# Altium PCB Quectel_EC600M-CN_PCB_Footprint_AD_V1.2.PcbDoc
Units mm, origin at the board's own origin, x right, y up, seen from the top; angles counter-clockwise.
Board outline 152.4 x 101.6 mm, 2 copper layers (Top Layer, Bottom Layer); 1 components, 0 nets, 100 pads, 0 vias.
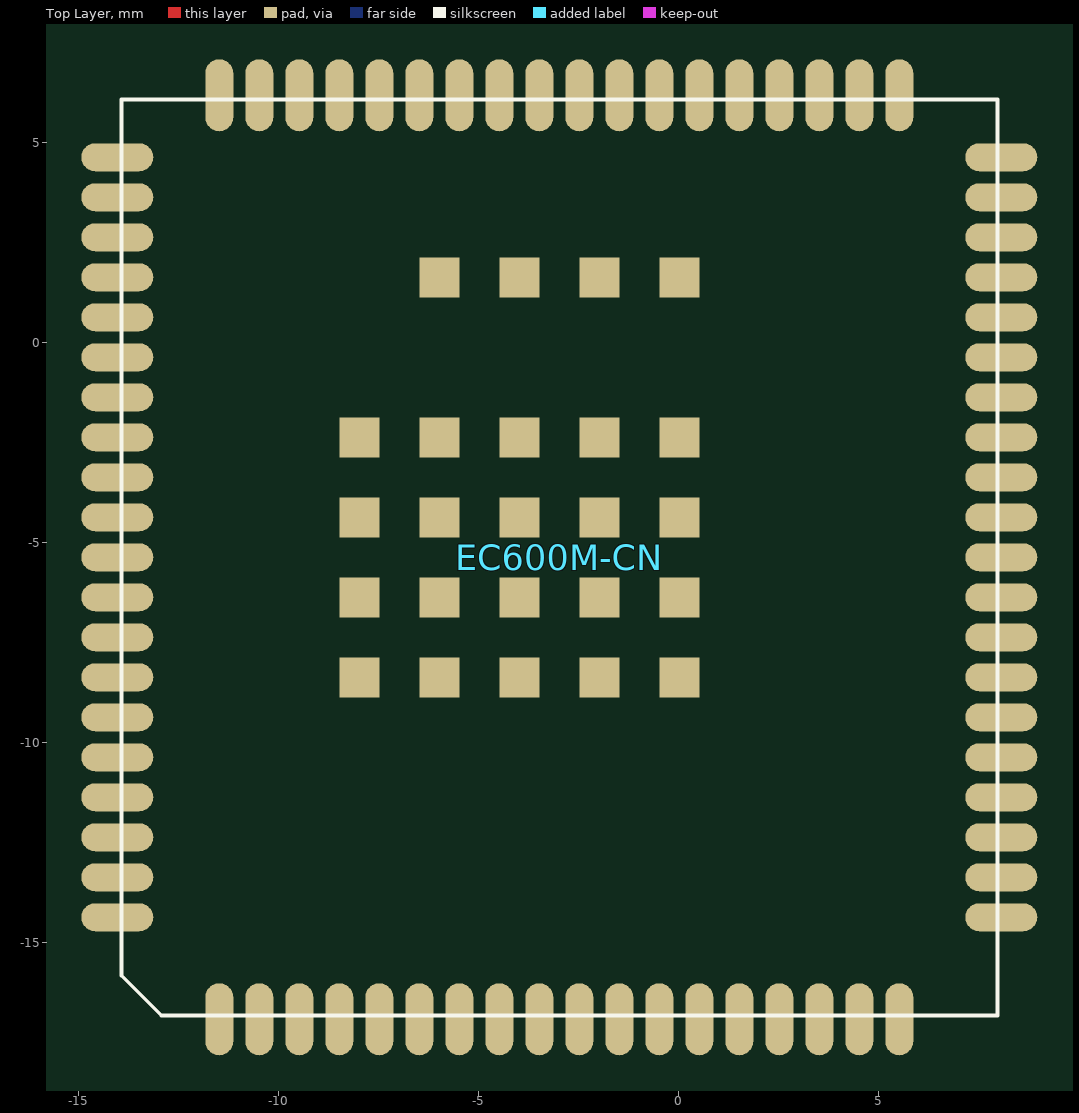
[diagram p0: Top Layer view]
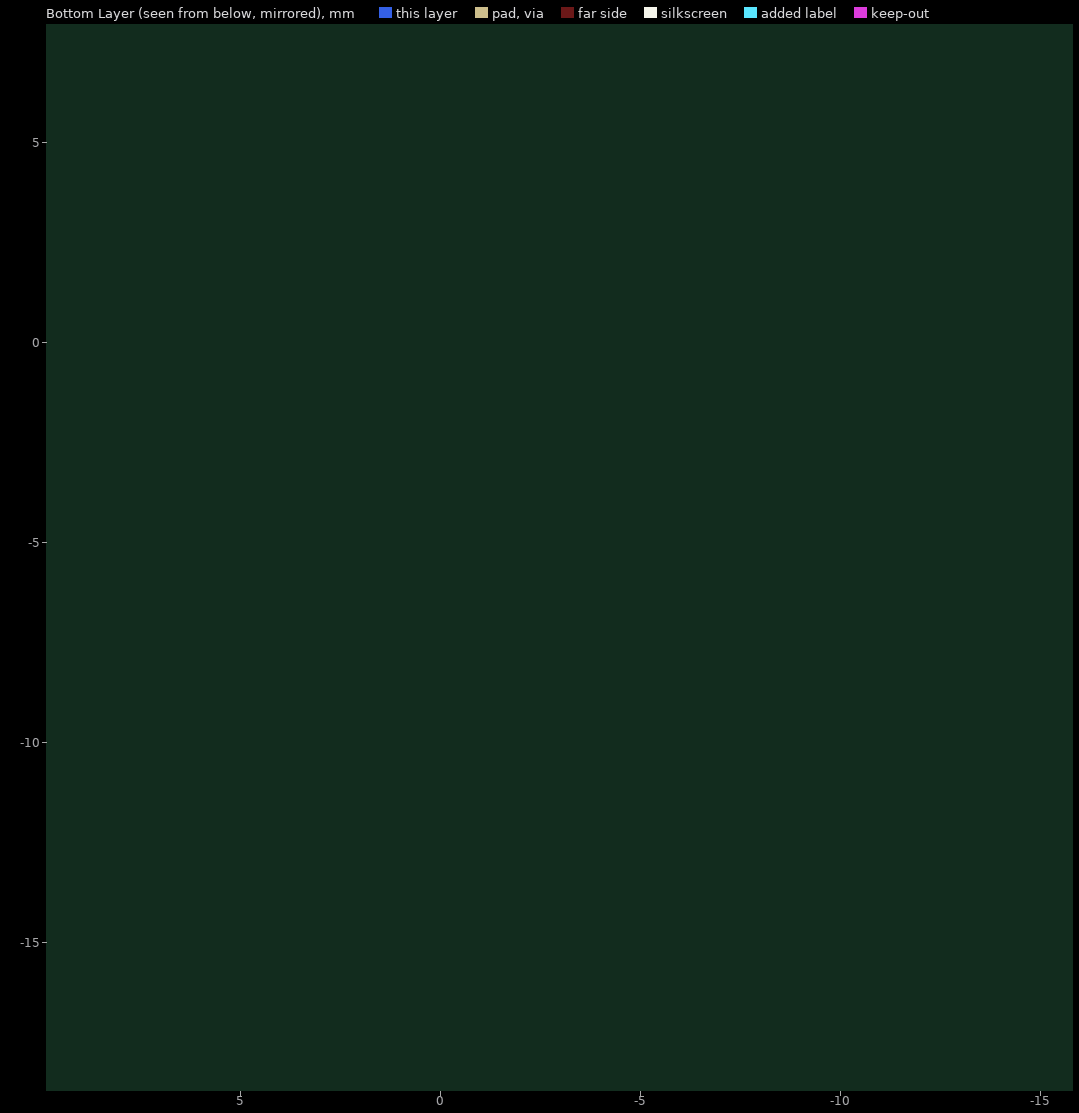
[diagram p1: Bottom Layer view, seen from below]

## Layer stack, top to bottom
Top Solder: solder mask 0.0102, Solder Resist, Dk 3.5
Top Layer: signal copper 0.0356
Dielectric1: dielectric 0.32, FR-4, Dk 4.8
Bottom Layer: signal copper 0.0356
Bottom Solder: solder mask 0.0102, Solder Resist, Dk 3.5

## Board outline
-70.739,-53.721 81.661,-53.721 81.661,47.879 -70.739,47.879

## Design rules (kind name [scope] priority, off if disabled: settings)
Clearance [All] p1: gap=0.254 ignorepadtopadclearanceinfootprint=FALSE except(0: Arc-Hole Track-Hole SMDPad-Hole THPad-Hole Via-Hole Fill-Hole Poly-Hole Region-Hole Text-Hole)
PolygonConnect [All] p1: connectstyle=Relief reliefconductorwidth=0.254 reliefentries=4 polygonreliefangle="90 Angle" airgapwidth=0.254
RoutingVias [All] p1: holewidth=0.711 width=1.27 viastyle="Through Hole" minholewidth=0.711 minwidth=1.27 maxholewidth=0.711 maxwidth=1.27
SolderMaskExpansion [All] p1: expansion=0.102 istentingtop=FALSE
Width [All] p1: maxlimit=0.254 minlimit=0.254 preferedwidth=0.254
30 further rules are at their usual default settings.

## Components (designator, comment, footprint, x,y, rotation, side; value= is the part's Value field where it differs from the comment)
EC600M-CN "Comment" EC600M-CN -2.975,-5.375 r0 top

## Footprints (in the part's own frame and the unit in brackets; to place one, negate y for a bottom-side part, rotate by r counter-clockwise, add the part's x,y. Pads: shape width x height; smd on the part's side, far side on the other; paste and mask are expansions set on the pad)
EC600M-CN [mm] "EC600M-CN Module 76LCC 24LGA 21.9×22.9mm H2.4mm RO"
  oval 0.7x1.8 smd mask+0.05: 1(-8.5,-11.55) 2(-7.5,-11.55) 3(-6.5,-11.55) 4(-5.5,-11.55) 5(-4.5,-11.55) 6(-3.5,-11.55) 7(-2.5,-11.55) 8(-1.5,-11.55) 9(-0.5,-11.55) 10(0.5,-11.55) 11(1.5,-11.55) 12(2.5,-11.55) 13(3.5,-11.55) 14(4.5,-11.55) 15(5.5,-11.55) 16(6.5,-11.55) 17(7.5,-11.55) 18(8.5,-11.55) 39(8.5,11.55) 40(7.5,11.55) 41(6.5,11.55) 42(5.5,11.55) 43(4.5,11.55) 44(3.5,11.55) 45(2.5,11.55) 46(1.5,11.55) 47(0.5,11.55) 48(-0.5,11.55) 49(-1.5,11.55) 50(-2.5,11.55) 51(-3.5,11.55) 52(-4.5,11.55) 53(-5.5,11.55) 54(-6.5,11.55) 55(-7.5,11.55) 56(-8.5,11.55)
  oval 1.8x0.7 smd mask+0.05: 19(11.05,-9) 20(11.05,-8) 21(11.05,-7) 22(11.05,-6) 23(11.05,-5) 24(11.05,-4) 25(11.05,-3) 26(11.05,-2) 27(11.05,-1) 28(11.05,0) 29(11.05,1) 30(11.05,2) 31(11.05,3) 32(11.05,4) 33(11.05,5) 34(11.05,6) 35(11.05,7) 36(11.05,8) 37(11.05,9) 38(11.05,10) 57(-11.05,10) 58(-11.05,9) 59(-11.05,8) 60(-11.05,7) 61(-11.05,6) 62(-11.05,5) 63(-11.05,4) 64(-11.05,3) 65(-11.05,2) 66(-11.05,1) 67(-11.05,0) 68(-11.05,-1) 69(-11.05,-2) 70(-11.05,-3) 71(-11.05,-4) 72(-11.05,-5) 73(-11.05,-6) 74(-11.05,-7) 75(-11.05,-8) 76(-11.05,-9)
  rect 1x1 smd mask+0.05: 77(-3,-3) 78(-1,-3) 79(1,-3) 80(3,-3) 81(3,-1) 82(3,1) 83(3,3) 84(1,3) 85(-1,3) 86(-3,3) 87(-3,1) 88(-3,-1) 89(-1,-1) 90(1,-1) 91(1,1) 92(-1,1) 109(-5,3) 110(-5,1) 111(-5,-1) 112(-5,-3) 145(3,7) 146(1,7) 147(-1,7) 148(-3,7)
  silkscreen extent -10.95,-11.45 10.95,11.45

## Nets (pads, with @x,y where several pads share a name; then routed paths per layer and width w, separated by ;. In a path a pad name is that pad's centre, name@x,y a point inside that pad or via, vN(x,y) a via of type N, cw(c..) or ccw(c..) an arc to the next point about the centre after c; other vN are vias at no path point)
pads on no net: EC600M-CN.1 EC600M-CN.2 EC600M-CN.3 EC600M-CN.4 EC600M-CN.5 EC600M-CN.6 EC600M-CN.7 EC600M-CN.8 EC600M-CN.9 EC600M-CN.10 EC600M-CN.11 EC600M-CN.12 EC600M-CN.13 EC600M-CN.14 EC600M-CN.15 EC600M-CN.16 EC600M-CN.17 EC600M-CN.18 EC600M-CN.19 EC600M-CN.20 EC600M-CN.21 EC600M-CN.22 EC600M-CN.23 EC600M-CN.24 EC600M-CN.25 EC600M-CN.26 EC600M-CN.27 EC600M-CN.28 EC600M-CN.29 EC600M-CN.30 EC600M-CN.31 EC600M-CN.32 EC600M-CN.33 EC600M-CN.34 EC600M-CN.35 EC600M-CN.36 EC600M-CN.37 EC600M-CN.38 EC600M-CN.39 EC600M-CN.40 EC600M-CN.41 EC600M-CN.42 EC600M-CN.43 EC600M-CN.44 EC600M-CN.45 EC600M-CN.46 EC600M-CN.47 EC600M-CN.48 EC600M-CN.49 EC600M-CN.50 EC600M-CN.51 EC600M-CN.52 EC600M-CN.53 EC600M-CN.54 EC600M-CN.55 EC600M-CN.56 EC600M-CN.57 EC600M-CN.58 EC600M-CN.59 EC600M-CN.60 EC600M-CN.61 EC600M-CN.62 EC600M-CN.63 EC600M-CN.64 EC600M-CN.65 EC600M-CN.66 EC600M-CN.67 EC600M-CN.68 EC600M-CN.69 EC600M-CN.70 EC600M-CN.71 EC600M-CN.72 EC600M-CN.73 EC600M-CN.74 EC600M-CN.75 EC600M-CN.76 EC600M-CN.77 EC600M-CN.78 EC600M-CN.79 EC600M-CN.80 EC600M-CN.81 EC600M-CN.82 EC600M-CN.83 EC600M-CN.84 EC600M-CN.85 EC600M-CN.86 EC600M-CN.87 EC600M-CN.88 EC600M-CN.89 EC600M-CN.90 EC600M-CN.91 EC600M-CN.92 EC600M-CN.109 EC600M-CN.110 EC600M-CN.111 EC600M-CN.112 EC600M-CN.145 EC600M-CN.146 EC600M-CN.147 EC600M-CN.148